# EAGLE board Sensor_Board (EAGLE 7.2.0)
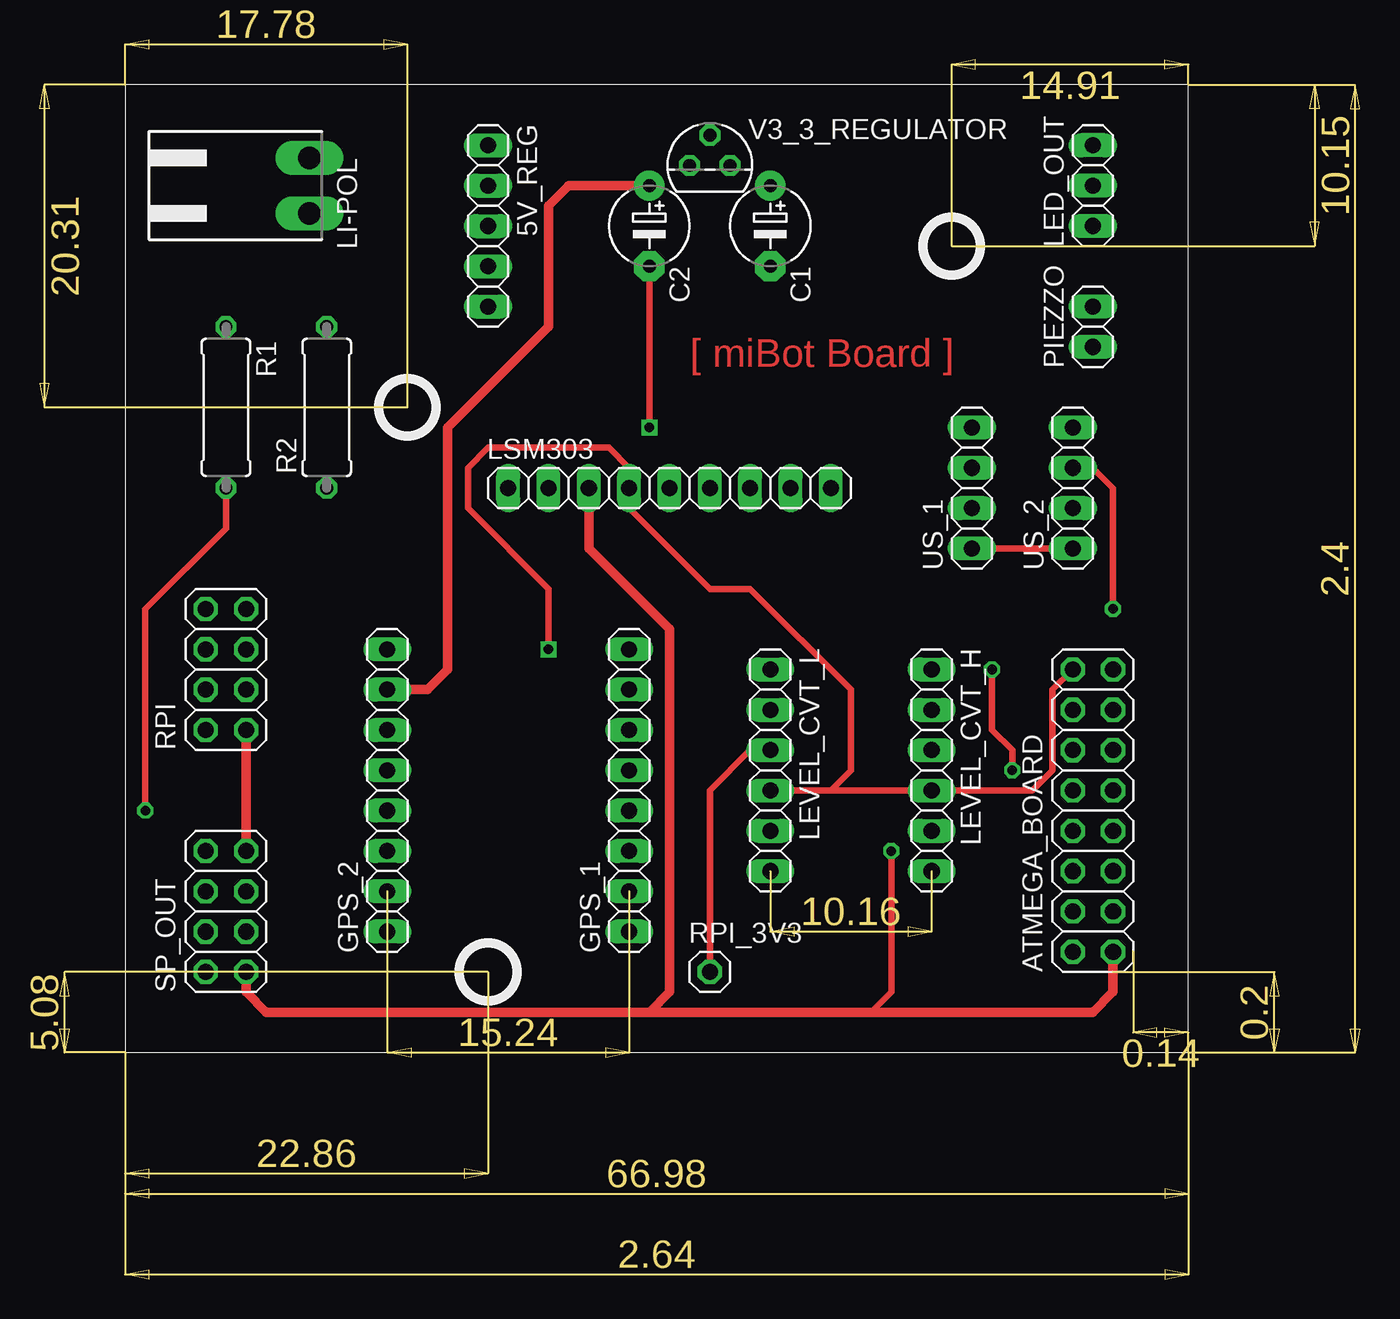
[diagram p0: board, top side]
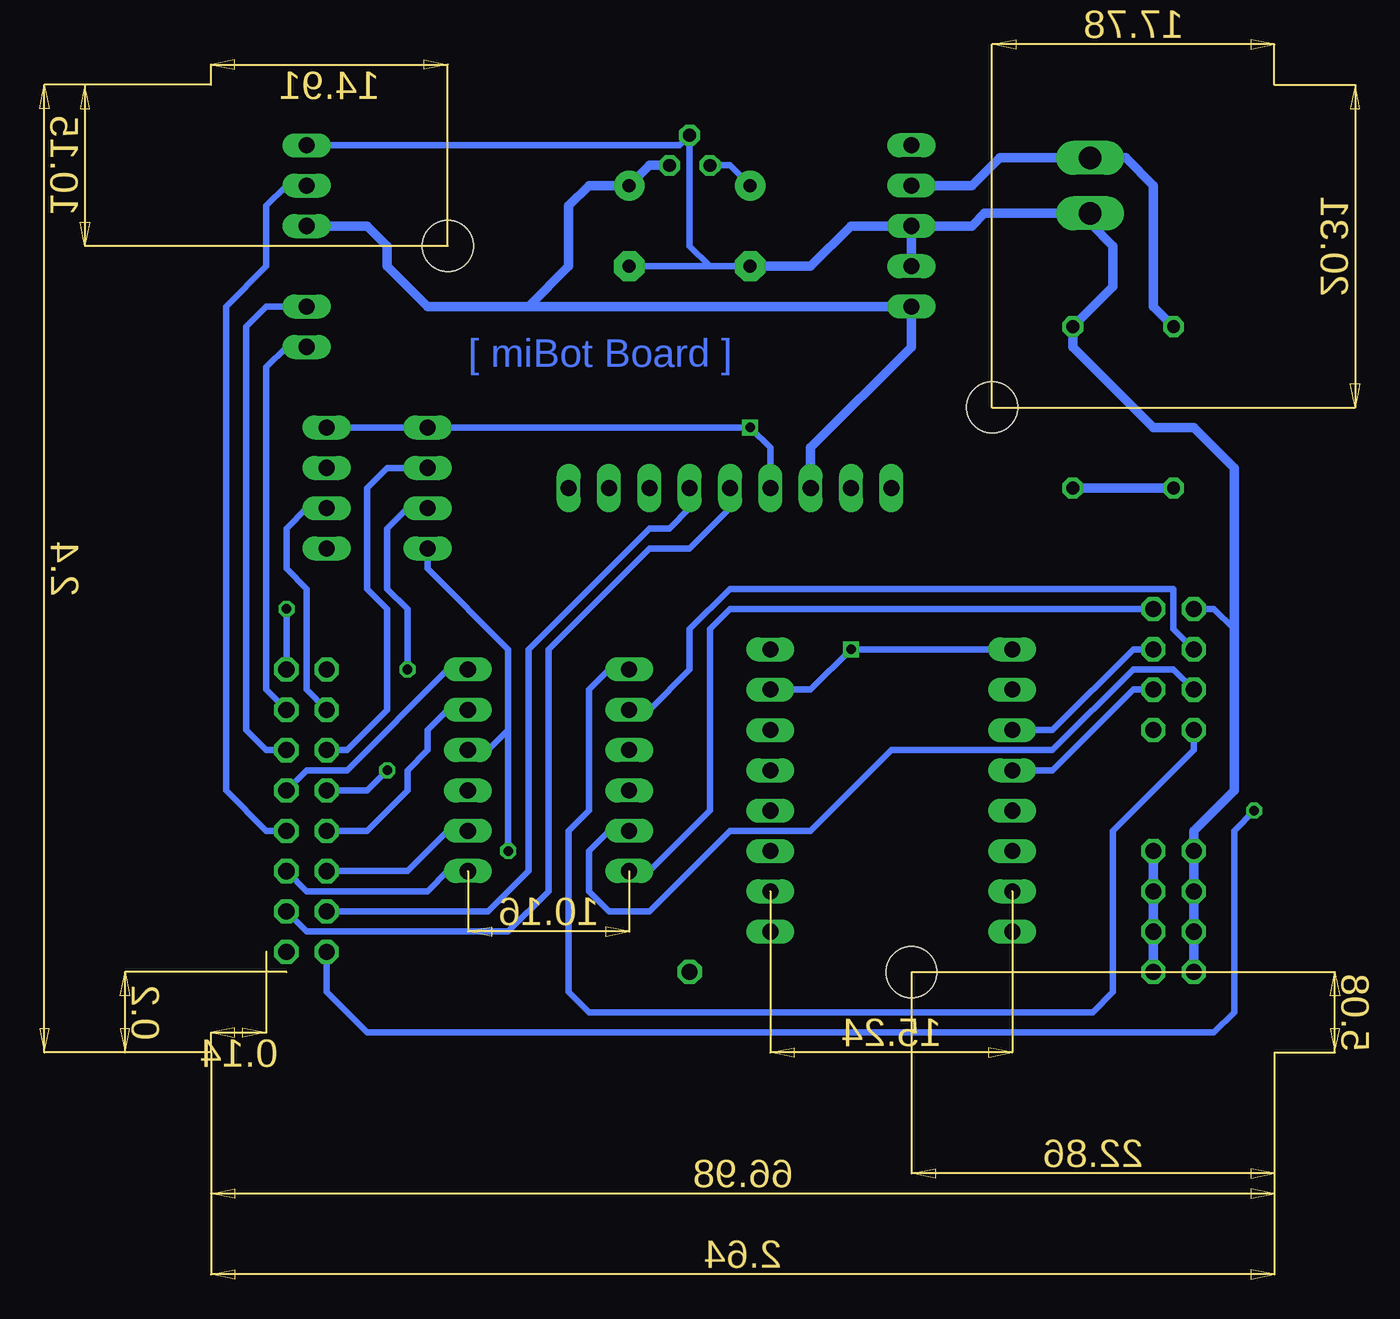
[diagram p1: board, bottom side, seen from below]

Size 83.15 x 78.07 mm. Coordinates in mm from the lower left corner, seen from the top.
Copper layers (1*16): Top 0.035mm / dielectric 1.5mm / Bottom 0.035mm
Design rules "default": minimum track width 10mil, minimum drill 24mil, track to track 8mil, track to pad 8mil, pad to pad 8mil, via to via 8mil, smd to smd 8mil, copper to edge 40mil, drill to drill 8mil, minimum pad ring 10mil, minimum via ring 8mil, stop-mask expansion 4mil, vias tented up to drill 0mil, thermal gap 10mil
Holes 3.2 mm at 57.45,65.07 23.16,54.91 28.24,19.35

## Footprints (pad centres in the part's own frame; a part is rotated, then mirrored left to right if it is on the bottom)
1X05 = drill 1.016 long: 1 -5.08,0; 2 -2.54,0; 3 0,0; 4 2.54,0; 5 5.08,0
2X08 = drill 1.016 octagon: 1 -8.89,-1.27; 2 -8.89,1.27; 3 -6.35,-1.27; 4 -6.35,1.27; 5 -3.81,-1.27; 6 -3.81,1.27; 7 -1.27,-1.27; 8 -1.27,1.27; 9 1.27,-1.27; 10 1.27,1.27; 11 3.81,-1.27; 12 3.81,1.27; 13 6.35,-1.27; 14 6.35,1.27; 15 8.89,-1.27; 16 8.89,1.27
E5-5 = drill 0.813 pad 1.905: + -2.54,0 | drill 0.813 pad 1.905 octagon: - 2.54,0
1X08 = drill 1.016 long: 1 -8.89,0; 2 -6.35,0; 3 -3.81,0; 4 -1.27,0; 5 1.27,0; 6 3.81,0; 7 6.35,0; 8 8.89,0
1X03 = drill 1.016 long: 1 -2.54,0; 2 0,0; 3 2.54,0
1X06 = drill 1.016 long: 1 -6.35,0; 2 -3.81,0; 3 -1.27,0; 4 1.27,0; 5 3.81,0; 6 6.35,0
90-2 = drill 1.422 long: 1 -1.75,5.25; 2 1.75,5.25
1X09 = drill 1.016 long: 1 -10.16,0; 2 -7.62,0; 3 -5.08,0; 4 -2.54,0; 5 0,0; 6 2.54,0; 7 5.08,0; 8 7.62,0; 9 10.16,0
1X02 = drill 1.016 long: 1 -1.27,0; 2 1.27,0
0309/10 = drill 0.813 octagon: 1 -5.08,0; 2 5.08,0
2X04 = drill 1.016 octagon: 1 -3.81,-1.27; 2 -3.81,1.27; 3 -1.27,-1.27; 4 -1.27,1.27; 5 1.27,-1.27; 6 1.27,1.27; 7 3.81,-1.27; 8 3.81,1.27
1X01 = drill 1.016 octagon: 1 0,0
1X04 = drill 1.016 long: 1 -3.81,0; 2 -1.27,0; 3 1.27,0; 4 3.81,0
TO92 = drill 0.813 octagon: 1 -1.27,0; 2 0,1.905; 3 1.27,0

## Placement (x,y rotation side)
5V_REG  [1X05]  28.24,66.34 270 top
ATMEGA_BOARD  [2X08]  66.34,29.51 90 top
C1  10uF  [E5-5]  46.02,66.34 270 top
C2  10uF  [E5-5]  38.4,66.34 270 top
GPS_1  [1X08]  37.13,30.78 90 top
GPS_2  [1X08]  21.89,30.78 90 top
LED_OUT  [1X03]  66.34,68.88 90 top
LEVEL_CVT_H  [1X06]  56.18,32.05 270 top
LEVEL_CVT_L  [1X06]  46.02,32.05 270 top
LI-POL  [90-2]  11.73,68.88 270 top
LSM303  [1X09]  39.67,49.83 0 top
PIEZZO  [1X02]  66.34,59.99 90 top
R1  1M  [0309/10]  11.73,54.91 270 top
R2  1M  [0309/10]  18.08,54.91 90 top
RPI  [2X04]  11.73,38.4 90 top
RPI_3V3  [1X01]  42.21,19.35 0 top
SP_OUT  [2X04]  11.73,23.16 90 top
US_1  [1X04]  58.72,49.83 90 top
US_2  [1X04]  65.07,49.83 90 top
V3_3_REGULATOR  [TO92]  42.21,70.15 0 top

## Library data of the parts
5V_REG ATMEGA_BOARD GPS_1 GPS_2 LED_OUT LEVEL_CVT_H LEVEL_CVT_L LSM303 PIEZZO RPI RPI_3V3 SP_OUT US_1 US_2 = pinhead
C1 C2 R1 R2 = resistor
LI-POL = con-weidmueller-sl35; OC_FARNELL: unknown; OC_NEWARK: unknown
V3_3_REGULATOR = linear

## Nets
ATM8_MISO: ATMEGA_BOARD.8 LEVEL_CVT_H.2
ATM8_MOSI: ATMEGA_BOARD.6 LEVEL_CVT_H.5
ATM8_SCK: ATMEGA_BOARD.9 LEVEL_CVT_H.1
ATM_RST: ATMEGA_BOARD.5 LEVEL_CVT_H.6
BAT_V: ATMEGA_BOARD.2 R1.2 R2.1
GND: 5V_REG.3 5V_REG.4 ATMEGA_BOARD.16 C1.- C2.- GPS_1.7 GPS_2.8 LED_OUT.3 LEVEL_CVT_H.4 LEVEL_CVT_L.4 LI-POL.2 LSM303.4 R2.2 RPI.8 SP_OUT.2 SP_OUT.4 SP_OUT.6 SP_OUT.8 US_1.4 US_2.4 V3_3_REGULATOR.2
GPS_RX: GPS_2.5 RPI.3
GPS_TX: GPS_2.6 RPI.5
LED_CTRL: ATMEGA_BOARD.7 LED_OUT.2
LSM_SCL: ATMEGA_BOARD.3 LSM303.5
LSM_SDA: ATMEGA_BOARD.4 LSM303.6
PIEZZO_N: ATMEGA_BOARD.11 PIEZZO.2
PIEZZO_P: ATMEGA_BOARD.13 PIEZZO.1
RPI_3V3: LEVEL_CVT_L.3 RPI_3V3.1
RPI_ATM_RST: LEVEL_CVT_L.6 RPI.7
RPI_MISO: LEVEL_CVT_L.2 RPI.6
RPI_MOSI: LEVEL_CVT_L.5 RPI.4
RPI_SCK: LEVEL_CVT_L.1 RPI.2
US1_ECHO: ATMEGA_BOARD.12 US_1.3
US1_TRIG: ATMEGA_BOARD.10 US_1.2
US2_ECHO: ATMEGA_BOARD.15 US_2.3
US2_TRIG: ATMEGA_BOARD.14 US_2.2
V3_3: C2.+ GPS_2.7 V3_3_REGULATOR.1
V_LI_POL: 5V_REG.2 LI-POL.1 R1.1
VCC: 5V_REG.5 ATMEGA_BOARD.1 C1.+ LED_OUT.1 LEVEL_CVT_H.3 LSM303.3 RPI.1 SP_OUT.1 SP_OUT.3 SP_OUT.5 SP_OUT.7 US_1.1 US_2.1 V3_3_REGULATOR.3

## Tracks (layer width: path | path; a pad name or v marks a point on that pad's centre or on a via)
ATM8_MISO
  Bottom 0.406: LEVEL_CVT_H.2 57.45,35.86 58.72,34.59 58.72,33.32 59.99,32.05 59.99,30.78 62.53,28.24 ATMEGA_BOARD.8
ATM8_MOSI
  Bottom 0.406: LEVEL_CVT_H.5 57.45,28.24 59.99,25.7 ATMEGA_BOARD.6
ATM8_SCK
  Bottom 0.406: ATMEGA_BOARD.9 66.34,32.05 63.8,32.05 57.45,38.4 LEVEL_CVT_H.1
ATM_RST
  Bottom 0.406: ATMEGA_BOARD.5 66.34,24.43 58.72,24.43 57.45,25.7 LEVEL_CVT_H.6
BAT_V  (via drill 0.6)
  Top 0.406: v6.65,29.51 6.65,42.21 11.73,47.29 R1.2
  Bottom 0.406: ATMEGA_BOARD.2 65.07,18.08 62.53,15.54 9.19,15.54 7.92,16.81 7.92,28.24 v6.65,29.51
  Bottom 0.61: R2.1 R1.2
GND  (via drill 0.6)
  Top 0.406: C2.- v38.4,53.64 | ATMEGA_BOARD.16 63.8,37.13 63.8,32.05 62.53,30.78 LEVEL_CVT_H.4 LEVEL_CVT_L.4 49.83,30.78 51.1,32.05 51.1,37.13 44.75,43.48 42.21,43.48 37.13,48.56 LSM303.4 37.13,51.1 35.86,52.37 28.24,52.37 26.97,51.1 26.97,48.56 32.05,43.48 v32.05,39.67
  Bottom 0.406: C2.- 40.94,63.8 | 40.94,63.8 42.21,65.07 V3_3_REGULATOR.2 42.85,71.42 LED_OUT.3 | C1.- 40.94,63.8 | RPI.8 9.19,42.21 7.92,40.94 | US_2.4 US_1.4 v38.4,53.64 37.13,52.37 LSM303.4 | GPS_2.8 v32.05,39.67 34.59,37.13 GPS_1.7
  Bottom 0.61: 5V_REG.3 24.43,66.34 23.64,67.13 LI-POL.2 16.98,66.51 15.54,65.07 15.54,62.53 R2.2 18.08,58.72 13,53.64 10.46,53.64 7.92,51.1 7.92,40.94 7.92,30.78 10.46,28.24 SP_OUT.8 SP_OUT.6 SP_OUT.4 SP_OUT.2 | 5V_REG.4 5V_REG.3 | 5V_REG.3 32.05,66.34 34.59,63.8 C2.-
GPS_RX
  Bottom 0.406: RPI.3 14.27,37.13 19.35,32.05 GPS_2.5
GPS_TX
  Bottom 0.406: RPI.5 14.27,39.67 19.35,34.59 GPS_2.6
LED_CTRL
  Bottom 0.406: LED_OUT.2 67.61,68.88 68.88,67.61 68.88,63.8 71.42,61.26 71.42,30.78 68.88,28.24 ATMEGA_BOARD.7
LSM_SCL
  Bottom 0.406: ATMEGA_BOARD.3 66.34,21.89 53.64,21.89 51.1,24.43 51.1,39.67 44.75,46.02 42.21,46.02 39.67,48.56 LSM303.5
LSM_SDA
  Bottom 0.406: ATMEGA_BOARD.4 54.91,23.16 52.37,25.7 52.37,39.67 44.75,47.29 43.48,47.29 42.21,48.56 LSM303.6
PIEZZO_N
  Bottom 0.406: ATMEGA_BOARD.11 68.88,33.32 70.15,34.59 70.15,59.99 68.88,61.26 PIEZZO.2
PIEZZO_P
  Bottom 0.406: PIEZZO.1 67.61,58.72 68.88,57.45 68.88,37.13 ATMEGA_BOARD.13
RPI_3V3
  Top 0.406: LEVEL_CVT_L.3 44.75,33.32 42.21,30.78 RPI_3V3.1
RPI_ATM_RST
  Bottom 0.406: RPI.7 39.67,42.21 40.94,40.94 40.94,29.51 44.75,25.7 LEVEL_CVT_L.6
RPI_MISO
  Bottom 0.406: RPI.6 11.73,40.94 11.73,43.48 39.67,43.48 42.21,40.94 42.21,38.4 44.75,35.86 LEVEL_CVT_L.2
RPI_MOSI
  Bottom 0.406: RPI.4 11.73,38.4 14.27,38.4 19.35,33.32 29.51,33.32 34.59,28.24 39.67,28.24 44.75,23.16 47.29,23.16 48.56,24.43 48.56,26.97 47.29,28.24 LEVEL_CVT_L.5
RPI_SCK
  Bottom 0.406: RPI.2 10.46,33.32 15.54,28.24 15.54,18.08 16.81,16.81 48.56,16.81 49.83,18.08 49.83,28.24 48.56,29.51 48.56,37.13 47.29,38.4 LEVEL_CVT_L.1
US1_ECHO
  Bottom 0.406: ATMEGA_BOARD.12 63.8,33.32 61.26,35.86 61.26,42.21 62.53,43.48 62.53,49.83 61.26,51.1 US_1.3
US1_TRIG  (via drill 0.6)
  Top 0.406: v61.26,32.05 61.26,33.32 59.99,34.59 v59.99,38.4
  Bottom 0.406: ATMEGA_BOARD.10 62.53,30.78 v61.26,32.05 | v59.99,38.4 59.99,42.21 61.26,43.48 61.26,47.29 59.99,48.56 US_1.2
US2_ECHO  (via drill 0.6)
  Top 0.406: v67.61,42.21 67.61,49.83 66.34,51.1 US_2.3
  Bottom 0.406: ATMEGA_BOARD.15 v67.61,42.21
US2_TRIG
  Bottom 0.406: ATMEGA_BOARD.14 66.34,37.13 66.34,43.48 67.61,44.75 67.61,47.29 66.34,48.56 US_2.2
V3_3
  Top 0.61: C2.+ 33.32,68.88 32.05,67.61 32.05,59.99 25.7,53.64 25.7,38.4 24.43,37.13 GPS_2.7
  Bottom 0.406: V3_3_REGULATOR.1 39.67,70.15 C2.+
V_LI_POL
  Bottom 0.61: 5V_REG.2 24.43,68.88 22.68,70.63 LI-POL.1 14.75,70.63 13,68.88 13,61.26 R1.1
VCC  (via drill 0.6)
  Top 0.406: US_1.1 US_2.1 | v53.64,26.97 53.64,18.08 52.37,16.81
  Top 0.61: SP_OUT.7 RPI.1 | LSM303.3 34.59,46.02 39.67,40.94 39.67,18.08 38.4,16.81 | 38.4,16.81 14.27,16.81 13,18.08 SP_OUT.1 | ATMEGA_BOARD.1 67.61,18.08 66.34,16.81 52.37,16.81 38.4,16.81
  Bottom 0.406: US_1.1 58.72,44.75 53.64,39.67 53.64,34.59 | 53.64,34.59 54.91,33.32 LEVEL_CVT_H.3 57.45,33.32 | 53.64,34.59 v53.64,26.97
  Bottom 0.61: 52.37,61.26 5V_REG.5 28.24,58.72 34.59,52.37 LSM303.3 | 52.37,61.26 49.83,63.8 49.83,67.61 48.56,68.88 C1.+ 44.75,70.15 V3_3_REGULATOR.3 | SP_OUT.1 SP_OUT.3 SP_OUT.5 SP_OUT.7 | 52.37,61.26 58.72,61.26 61.26,63.8 61.26,65.07 62.53,66.34 LED_OUT.1

## Text on the board
Top: [ miBot Board ]
Bottom: [ miBot Board ]